# EAGLE board ACU rev2 TSB rev2 CCU rev7 TSAL rev5 (EAGLE 9.6.2), part 1 of 3
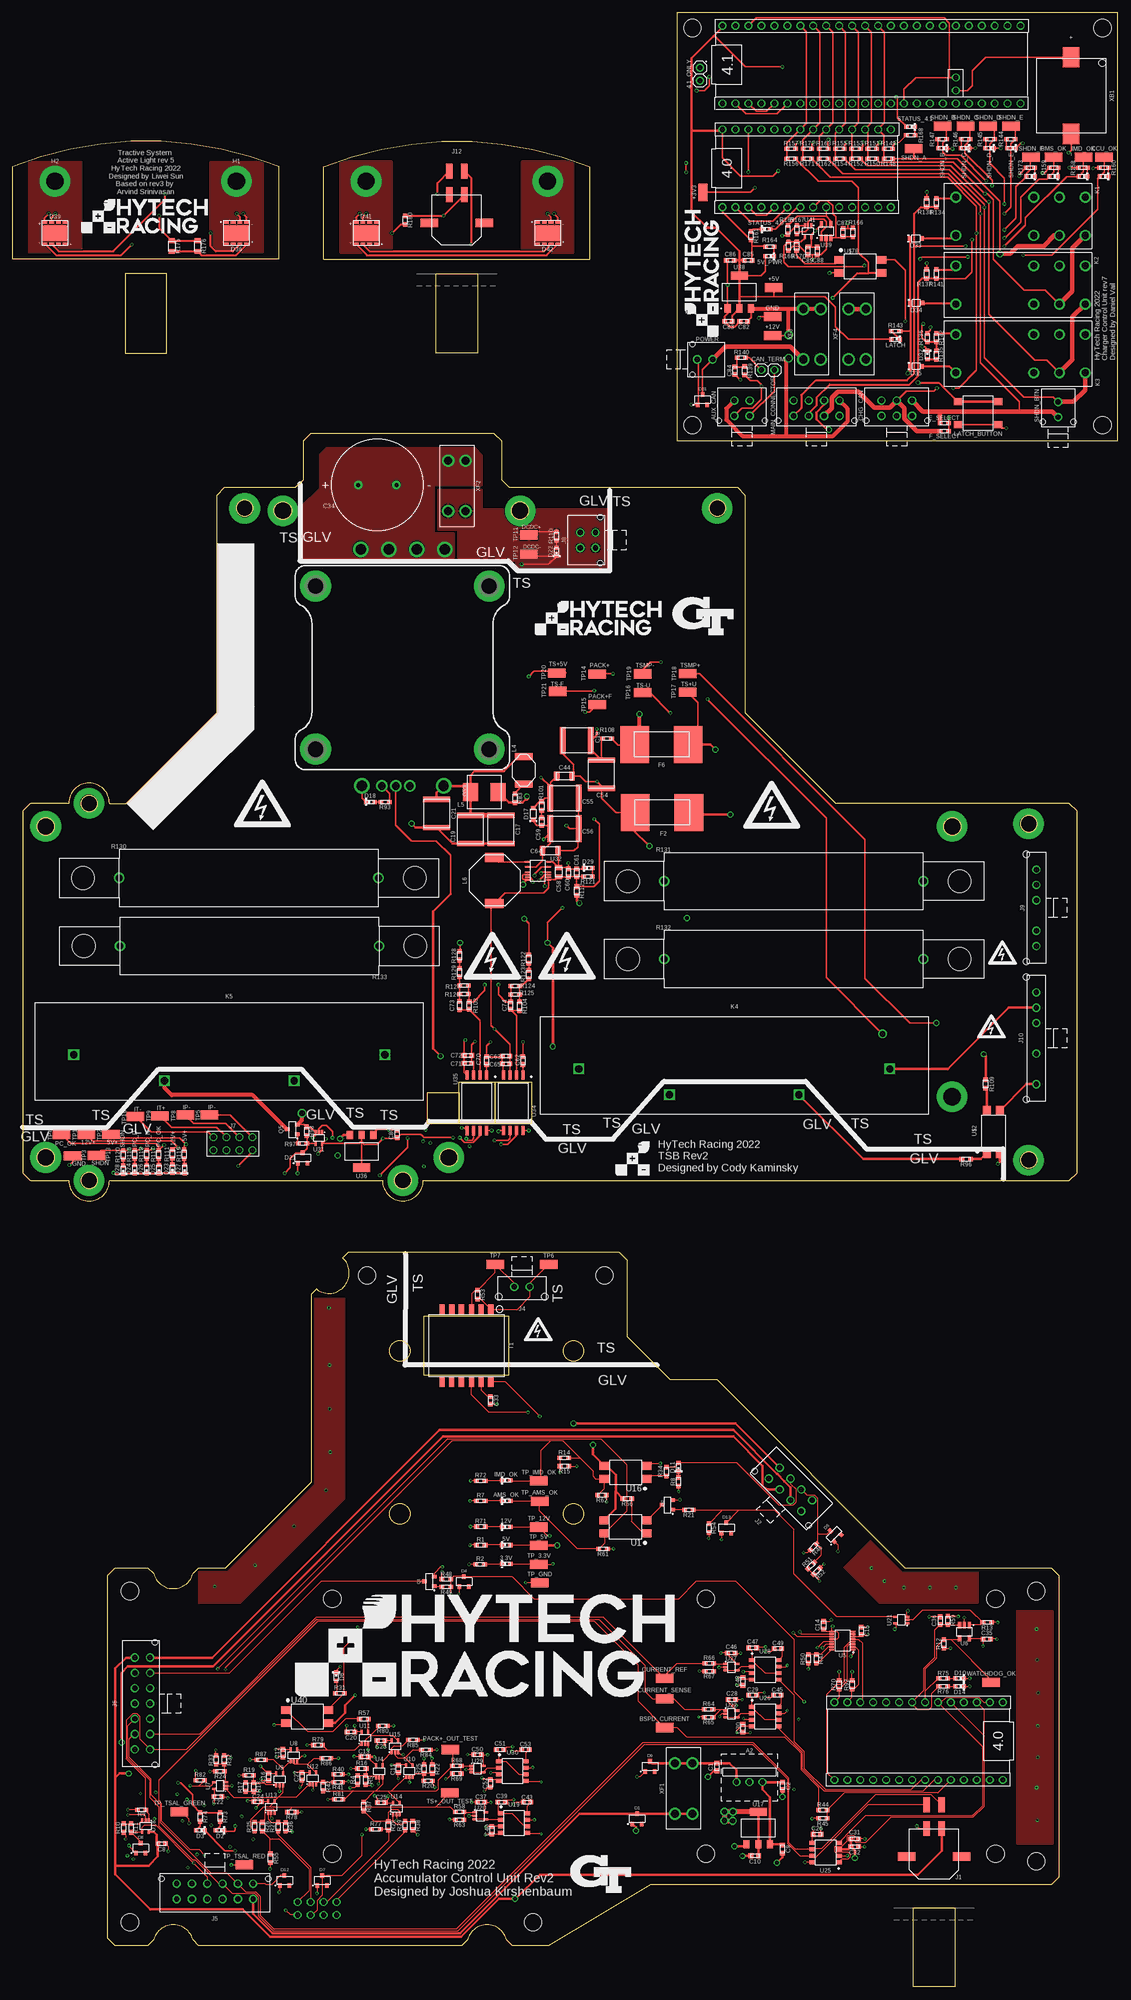
[diagram p0: board, top side]
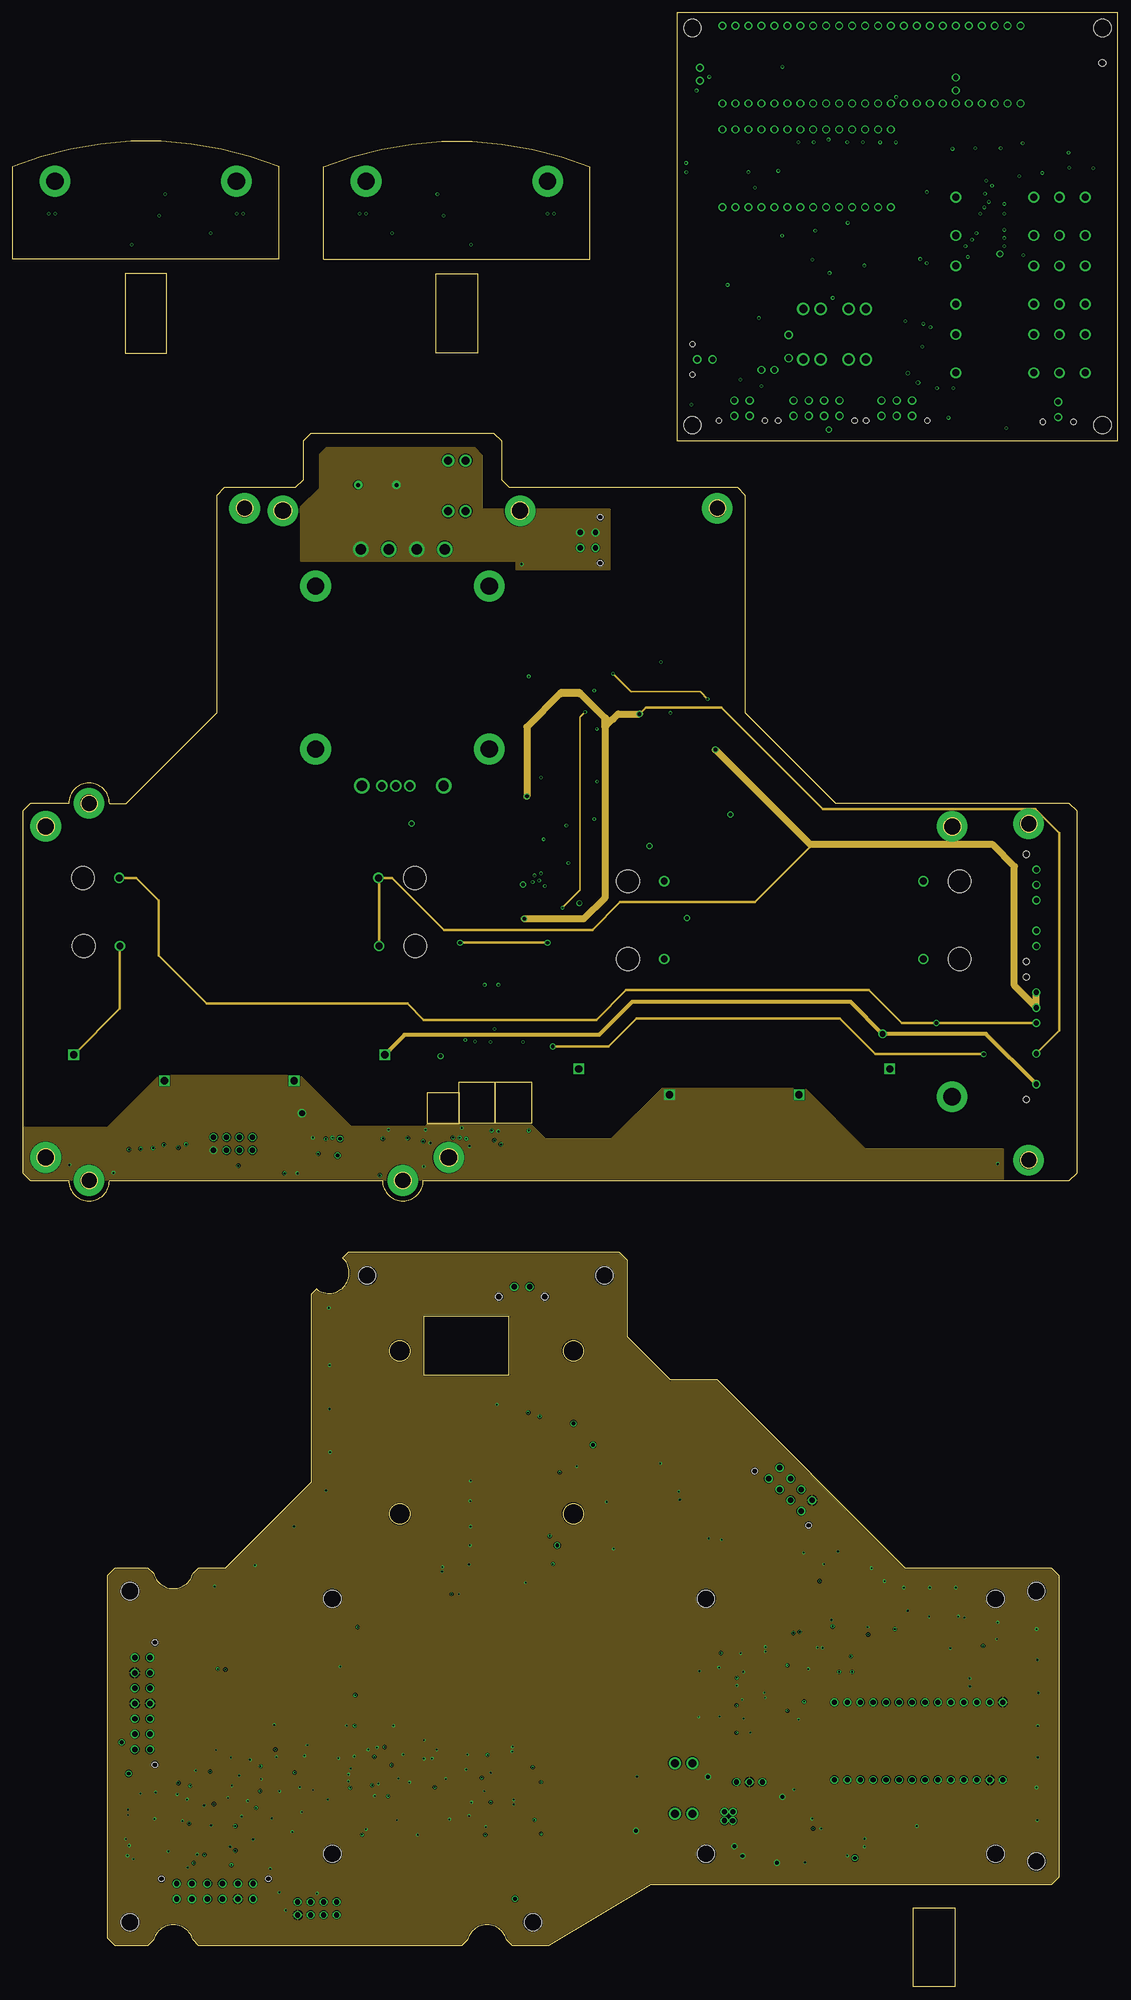
[diagram p1: board, inner layer Route2]
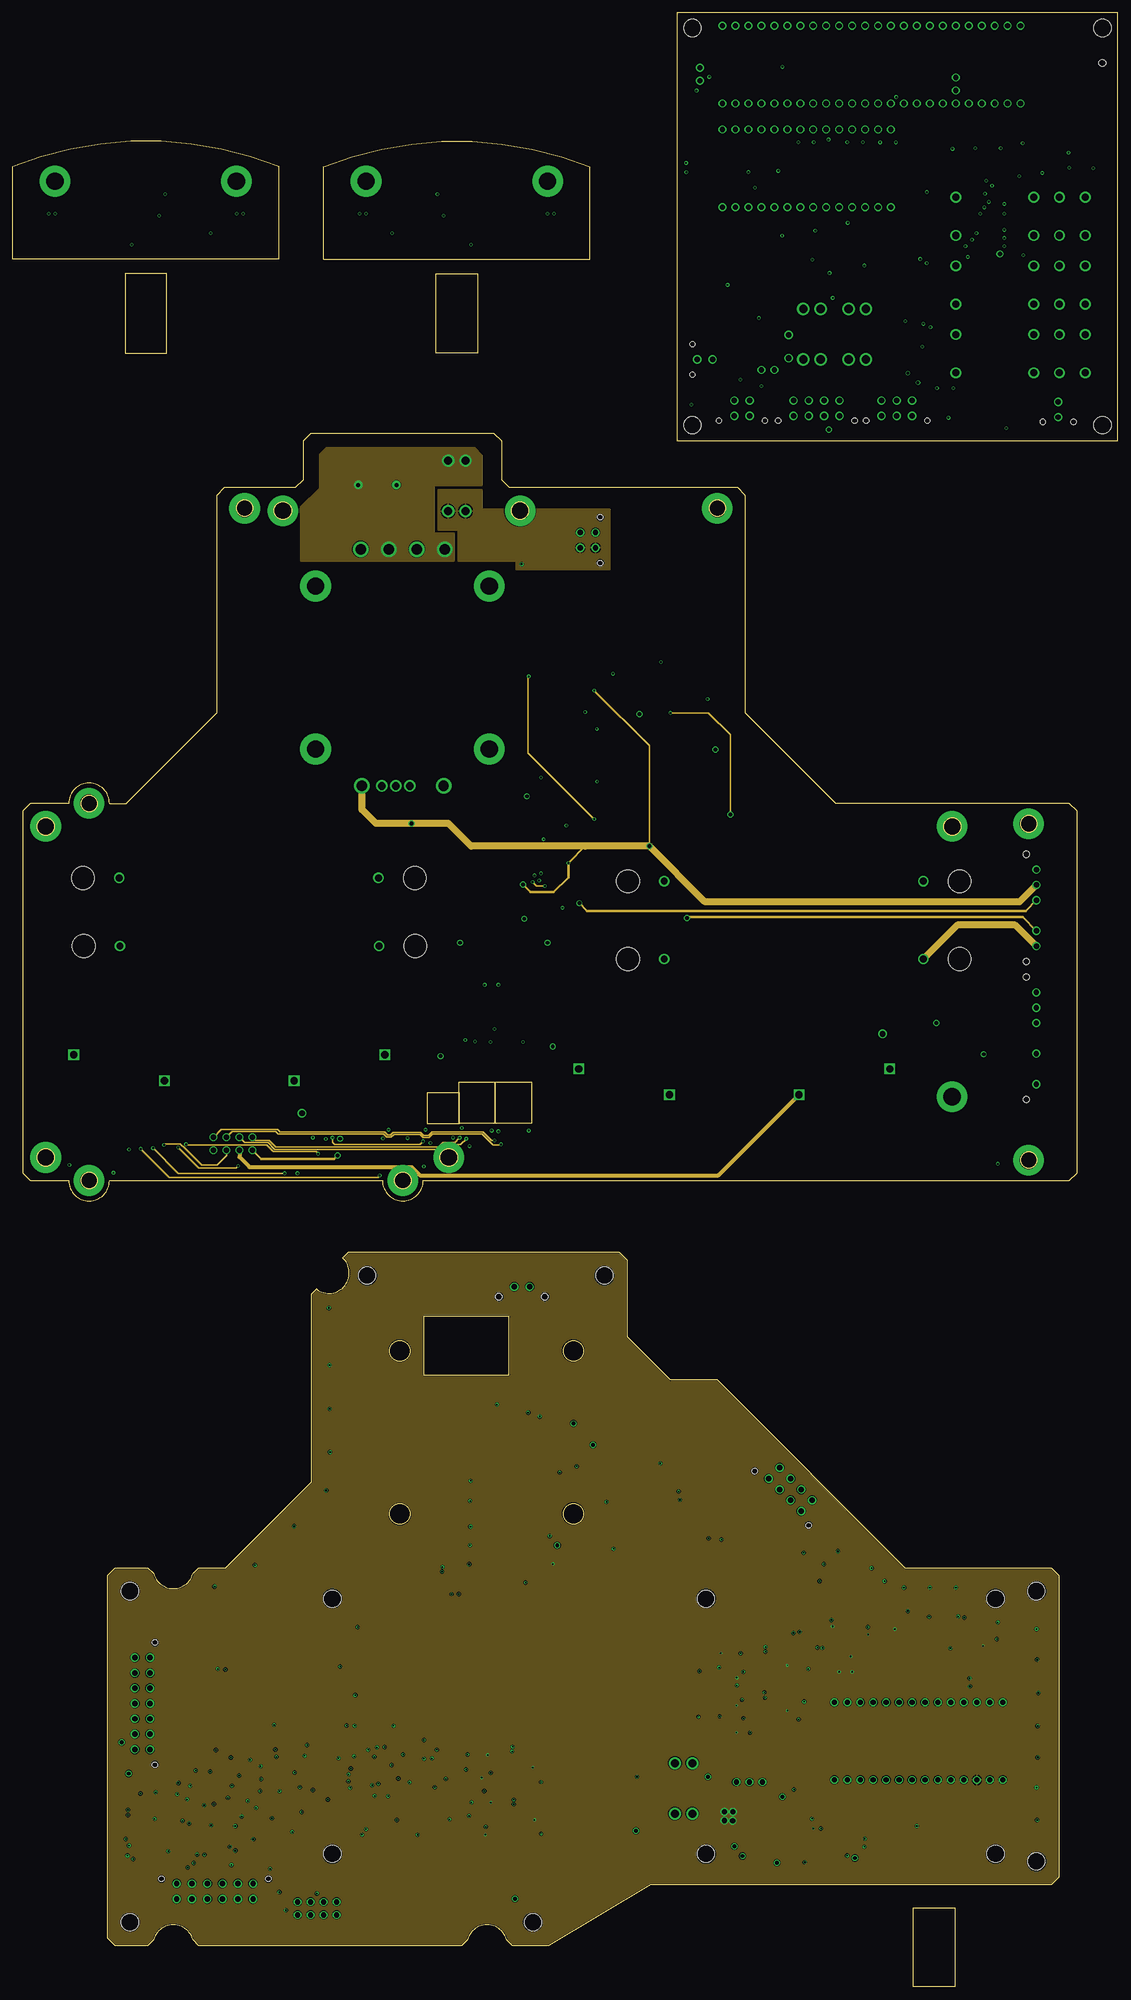
[diagram p2: board, inner layer Route15]
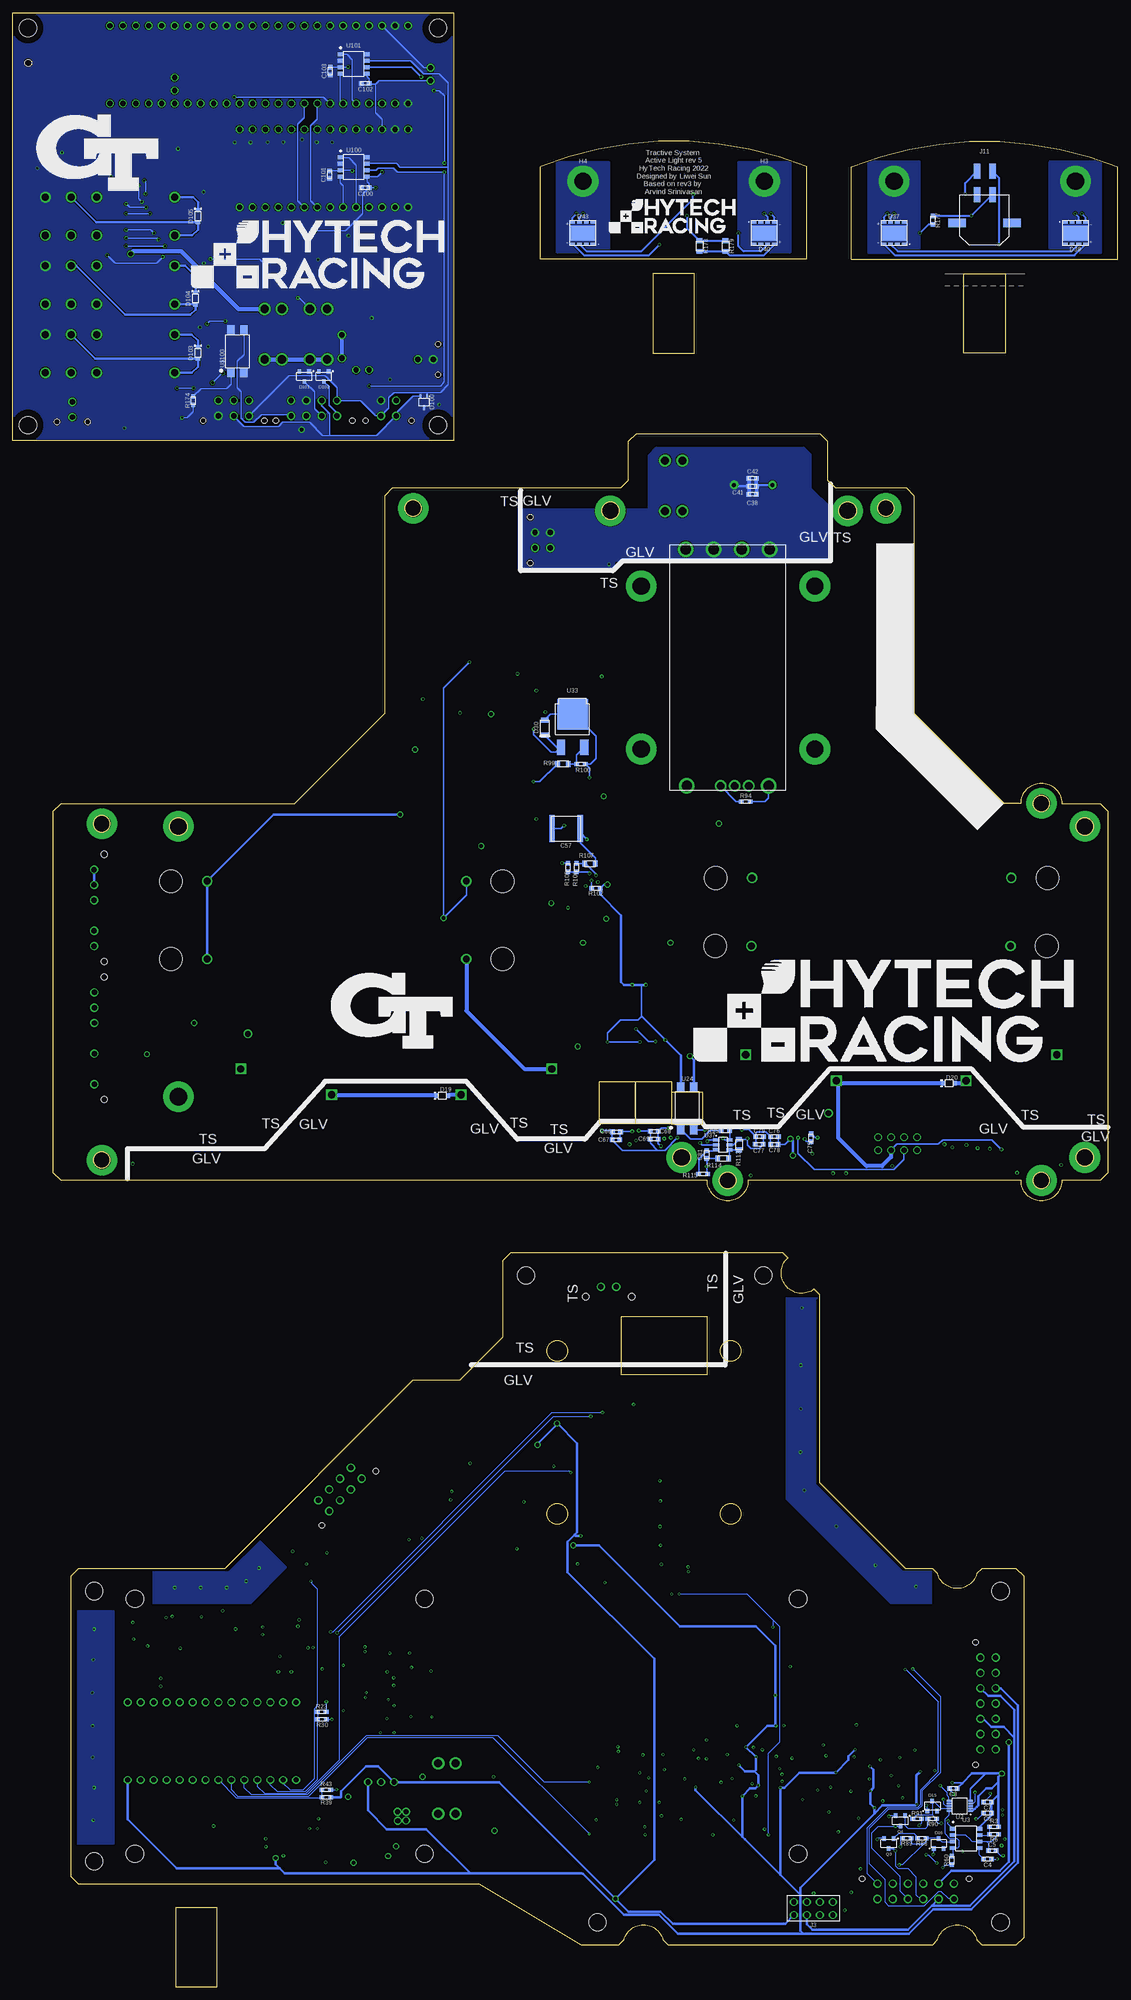
[diagram p3: board, bottom side, seen from below]

Size 216.59 x 378.69 mm. Coordinates in mm from the lower left corner, seen from the top.
Outline: 18.47,72.39 18.47,1.5 19.97,0 26.55,0 27.61,1.06 arc-149 35.32,1.06 36.38,0 88.05,0 89.11,1.06 arc-149 96.82,1.06 97.88,0 105.14,0 125.14,11.89 203.64,11.89 205.14,13.39 205.14,72.39 203.64,73.89 174.99,73.89 138.14,110.74 128.95,110.74 120.47,119.22 120.47,134.24 118.97,135.74 65.74,135.74 64.68,134.68 arc-175 59.53,128.57 58.47,127.5 58.47,90.74 41.62,73.89 36.38,73.89 35.32,72.83 arc-149 27.61,72.83 26.55,73.89 19.97,73.89 18.47,72.39
Outline: 1.96,222.25 1.96,151.36 3.46,149.86 10.96,149.86 arc180 18.96,149.86 72.46,149.86 arc180 80.46,149.86 207.13,149.86 208.63,151.36 208.63,222.25 207.13,223.75 161.31,223.75 143.63,241.43 143.63,284.09 142.13,285.59 97.38,285.59 95.88,287.09 95.88,294.71 94.38,296.21 58.38,296.21 56.88,294.71 56.88,287.09 55.38,285.59 41.46,285.59 39.96,284.09 39.96,241.43 22.28,223.75 18.96,223.75 arc180 10.96,223.75 3.46,223.75 1.96,222.25
Outline: 130.23,294.87 216.59,294.87 216.59,378.69 130.23,378.69 130.23,294.87
Outline: 52.17,330.43 52.17,348.49 arc44 0,348.49 0,330.43 52.17,330.43
Outline: 60.96,330.43 60.96,348.49 arc-44 113.13,348.49 113.13,330.43 60.96,330.43
Outline: circle at 109.88,116.49 radius 2
Outline: circle at 75.87,84.51 radius 2
Outline: circle at 109.88,84.53 radius 2
Outline: circle at 75.87,116.49 radius 2
Outline: circle at 6.46,219.25 radius 1.7
Outline: circle at 6.46,154.36 radius 1.7
Outline: circle at 85.46,154.36 radius 1.7
Outline: circle at 184.13,219.25 radius 1.7
Outline: circle at 52.96,281.09 radius 1.7
Outline: circle at 99.46,281.09 radius 1.7
Outline: circle at 138.13,281.59 radius 1.6
Outline: circle at 199.13,219.75 radius 1.6
Outline: circle at 199.13,153.86 radius 1.6
Outline: circle at 14.96,149.86 radius 1.6
Outline: circle at 14.96,223.75 radius 1.6
Outline: circle at 45.46,281.59 radius 1.6
Outline: circle at 76.46,149.86 radius 1.6
Copper layers (1+2*15+16): Top 0.035mm / dielectric 0.2mm / Route2 0.0175mm / dielectric 1.065mm / Route15 0.0175mm / dielectric 0.2mm / Bottom 0.035mm
Design rules "JLCPCB (4 Layer)": minimum track width 5mil, minimum drill 0.2mm, track to track 5mil, track to pad 5mil, pad to pad 5mil, via to via 20mil, smd to smd 5mil, copper to edge 0.2mm, drill to drill 21mil, minimum pad ring 6mil, minimum via ring 5mil, stop-mask expansion 2mil, vias tented up to drill 30mil, thermal gap 10mil

## Footprints (pad centres in the part's own frame; a part is rotated, then mirrored left to right if it is on the bottom)
0603-LED = smd 0.8 x 0.8: 1 -0.825,0; 2 0.825,0
1X02 = drill 1.016: 1 -1.27,0; 2 1.27,0
TEENSY_SHORT = drill 1.016: 3.3V 0,5.08; AGND/GND 0,2.54; D0 15.24,2.54; D1 15.24,5.08; D2 15.24,7.62; D3 15.24,10.16; D4 15.24,12.7; D5 15.24,15.24; D6 15.24,17.78; D7 15.24,20.32; D8 15.24,22.86; D9 15.24,25.4; D10 15.24,27.94; D11 15.24,30.48; D12 15.24,33.02; D13 0,33.02; D14 0,30.48; D15 0,27.94; D16 0,25.4; D17 0,22.86; D18 0,20.32; D19 0,17.78; D20 0,15.24; D21 0,12.7; D22 0,10.16; D23 0,7.62; GND 15.24,0; VIN 0,0
OKI-78SR = drill 0.991: 1 -2.54,0; 2 0,0; 3 2.54,0
TEENSY_LONG_EXT = drill 1.016: 3V3 0,5.08; 3V3@2 15.24,35.56; 3V3@3 10.16,45.72; AGND/GND 0,2.54; D0 15.24,2.54; D1 15.24,5.08; D2 15.24,7.62; D3 15.24,10.16; D4 15.24,12.7; D5 15.24,15.24; D6 15.24,17.78; D7 15.24,20.32; D8 15.24,22.86; D9 15.24,25.4; D10 15.24,27.94; D11 15.24,30.48; D12 15.24,33.02; D13 0,33.02; D14 0,30.48; D15 0,27.94; D16 0,25.4; D17 0,22.86; D18 0,20.32; D19 0,17.78; D20 0,15.24; D21 0,12.7; D22 0,10.16; D23 0,7.62; D24 15.24,38.1; D25 15.24,40.64; D26 15.24,43.18; D27 15.24,45.72; D28 15.24,48.26; D29 15.24,50.8; D30 15.24,53.34; D31 15.24,55.88; D32 15.24,58.42; D33 0,58.42; D34 0,55.88; D35 0,53.34; D36 0,50.8; D37 0,48.26; D38 0,45.72; D39 0,43.18; D40 0,40.64; D41 0,38.1; GND 15.24,0; GND@2 0,35.56; VBAT 12.7,45.72; VIN 0,0
MOLEX_MICROFIT_PTH_VERTICAL_04_DUAL = drill 1.067: 1 1.499,-2.997; 2 -1.499,-2.997; 3 1.499,0; 4 -1.499,0 | hole 1.067: 4.496,0.94; -4.496,0.94
MICRO_MINIATURE = smd 3.429 x 1.778: 1 0,0
0603-CAP = smd 0.9 x 0.9: 1 -0.75,0; 2 0.75,0
2220-CAP = smd 1.05 x 5.3: 1 -2.775,0; 2 2.775,0
EKYC*MM = drill 0.8 pad 1.651: + 3.75,0; - -3.75,0
1206-CAP = smd 1 x 1.8: 1 -1.5,0; 2 1.5,0
0805-CAP = smd 0.95 x 1.4: 1 -0.925,0; 2 0.925,0
MOLEX_MICROFIT_PTH_VERTICAL_06_DUAL = drill 1.067: 1 2.997,-2.997; 2 0,-2.997; 3 -2.997,-2.997; 4 2.997,0; 5 0,0; 6 -2.997,0 | hole 1.067: 5.994,0.94; -5.994,0.94
SOT-23 = smd 0.711 x 0.889: 1 -0.94,-1.003; 2 0.94,-1.003; 3 0,1.003
SOD-323 = smd 0.8 x 0.9: A -1.15,0; C 1.15,0
SOD123F = smd 1 x 1.5: A -1.45,0; C 1.45,0
IN-505FCHWV = smd 0.975 x 0.65: A+ -2.013,2.175; A- -2.013,-2.175; D+ 2.013,2.175; D- 2.013,-2.175 | smd 0.925 x 0.65: B+ -0.662,2.175; B- -0.662,-2.175; C+ 0.662,2.175; C- 0.662,-2.175 | smd 5 x 2.9: THERMAL 0,0
SC-70-3 = smd 0.95 x 0.4: 1 -1.1,0.65; 2 -1.1,-0.65; 3 1.1,0
0603-RES = smd 0.9 x 0.8: 1 -0.85,0; 2 0.85,0
0885 = smd 5.6 x 7.23: 1 -5.25,0; 2 5.25,0
MOUNTING_M3 = drill 3.4 pad 6: P$1 0,0
MOLEX_MICROFIT_SMD_RIGHTANGLE_04_DUAL = smd 1.27 x 2.921: 1 1.5,5.474; 2 -1.5,5.474; 3 1.5,10.097; 4 -1.5,10.097 | smd 3.429 x 1.651: PAD1 5.386,0; PAD2 -5.386,0
MOLEX_MICROFIT_PTH_VERTICAL_08_DUAL = drill 1.067: 1 4.496,-2.997; 2 1.499,-2.997; 3 -1.499,-2.997; 4 -4.496,-2.997; 5 4.496,0; 6 1.499,0; 7 -1.499,0; 8 -4.496,0 | hole 1.067: 7.493,0.94; -7.493,0.94
FLEX_STACK_PTH_08_DUAL = drill 1.016: 1 -3.81,1.27; 2 -1.27,1.27; 3 1.27,1.27; 4 3.81,1.27; 5 -3.81,-1.27; 6 -1.27,-1.27; 7 1.27,-1.27; 8 3.81,-1.27
MOLEX_MICROFIT_PTH_VERTICAL_02_SINGLE = drill 1.067: 1 1.499,0; 2 -1.499,0 | hole 1.321: 4.496,-1.956; -4.496,-1.956
MOLEX_MICROFIT_PTH_VERTICAL_12_DUAL = drill 1.067: 1 7.493,-2.997; 2 4.496,-2.997; 3 1.499,-2.997; 4 -1.499,-2.997; 5 -4.496,-2.997; 6 -7.493,-2.997; 7 7.493,0; 8 4.496,0; 9 1.499,0; 10 -1.499,0; 11 -4.496,0; 12 -7.493,0 | hole 1.067: 10.49,0.94; -10.49,0.94
MOLEX_MICROFIT_PTH_VERTICAL_14_DUAL = drill 1.067: 1 8.992,-2.997; 2 5.994,-2.997; 3 2.997,-2.997; 4 0,-2.997; 5 -2.997,-2.997; 6 -5.994,-2.997; 7 -8.992,-2.997; 8 8.992,0; 9 5.994,0; 10 2.997,0; 11 0,0; 12 -2.997,0; 13 -5.994,0; 14 -8.992,0 | hole 1.067: 11.989,0.94; -11.989,0.94
MOLEX_MICROFIT_PTH_VERTICAL_06_SINGLE_SPACED = drill 1.067: 1 -7.493,0; 2 -4.496,0; 3 -1.499,0; 4 4.496,0; 5 7.493,0 | hole 1.27: 10.503,-1.956; -10.503,-1.956
MOLEX_MICROFIT_PTH_VERTICAL_07_SINGLE_SPACED = drill 1.067: 1 -8.992,0; 2 -5.994,0; 3 -2.997,0; 4 2.997,0; 5 8.992,0 | hole 1.27: 12.002,-1.956; -12.002,-1.956
RT*2* = drill 1.4: 11 0,3.75; 12 -5.04,3.75; 14 5.04,3.75; 21 0,-3.75; 22 -5.04,-3.75; 24 5.04,-3.75; A1 -20.3,3.75; A2 -20.3,-3.75
335X = drill 1.397 square: 1 30.48,0; 2 12.7,-5.08; 3 -12.7,-5.08; 4 -30.48,0
74451133 = smd 1.4 x 3.5: 1 -2.7,0; 2 2.7,0
WE-LMHI = smd 2.95 x 3.5: 1 -2.725,0; 2 2.725,0
SRU1048 = smd 1.8 x 3.6: 1 -4.5,0; 2 4.5,0
B3S-100X = smd 1.55 x 1.3: 1 3.975,-2.25; 2 -3.975,-2.25; 3 3.975,2.25; 4 -3.975,2.25
MOLEX_MICROFIT_PTH_VERTICAL_02_DUAL = drill 1.067: 1 0,-2.997; 2 0,0 | hole 1.067: 2.997,0.94; -2.997,0.94
0805-RES = smd 0.9 x 1.2: 1 -1.05,0; 2 1.05,0
B20 = drill 1.35: 1 25.4,0; 2 -25.4,0 | hole 4.5: -32.51,0; 32.51,0
HM2112ZNLT_AIRGAP = smd 1.02 x 1.89: 1 -4.78,-7.145; 2 -2.89,-7.145; 3 -1,-7.145; 4 1,-7.145; 5 2.875,-7.145; 6 4.78,-7.145; 7 4.78,7.145; 8 2.89,7.145; 9 1,7.145; 10 -1,7.145; 11 -2.89,7.145; 12 -4.78,7.145
5015 = smd 3.429 x 1.778: 1 0,0
DIP-4 = smd 1.5 x 1.9: 1 -1.27,-4.15; 2 1.27,-4.15; 3 -1.27,4.15; 4 1.27,4.15
MSOP-10 = smd 0.305 x 0.889: 1 -1,-2.106; 2 -0.5,-2.106; 3 0,-2.106; 4 0.5,-2.106; 5 1,-2.106; 6 1,2.106; 7 0.5,2.106; 8 0,2.106; 9 -0.5,2.106; 10 -1,2.106
SOIC-08(NARROW,0.15") = smd 0.762 x 1.143: 1 -1.905,-2.603; 2 -0.635,-2.603; 3 0.635,-2.603; 4 1.905,-2.603; 5 1.905,2.603; 6 0.635,2.603; 7 -0.635,2.603; 8 -1.905,2.603
SC-70-5 = smd 0.4 x 0.9: 1 -0.65,-1.1; 2 0,-1.1; 3 0.65,-1.1; 4 0.65,1.1; 5 -0.65,1.1
MSOP-16 = smd 0.305 x 0.889: 1 -1.75,-2.106; 2 -1.25,-2.106; 3 -0.75,-2.106; 4 -0.25,-2.106; 5 0.25,-2.106; 6 0.75,-2.106; 7 1.25,-2.106; 8 1.75,-2.106; 9 1.75,2.106; 10 1.25,2.106; 11 0.75,2.106; 12 0.25,2.106; 13 -0.25,2.106; 14 -0.75,2.106; 15 -1.25,2.106; 16 -1.75,2.106
SOT-23-5 = smd 0.62 x 1.22: 1 -0.95,-1.31; 2 0,-1.31; 3 0.95,-1.31; 4 0.95,1.31; 5 -0.95,1.31
SOT223 = smd 1.2 x 1.6: 1 -2.3,-3.2; 2 0,-3.2; 3 2.3,-3.2 | smd 3.3 x 1.6: 4 0,3.2
DCM4623 = drill 2.03 pad 2.79: 1 -23.19,8; 5 -23.19,-8; 6 23.19,8.25; 7 23.19,2.75; 8 23.19,-2.75; 9 23.19,-8.25 | drill 1.52 pad 2.02: 2 -23.19,1.38; 3 -23.19,-1.38; 4 -23.19,-4.13
DIP-4_AIRGAP = smd 1.5 x 1.9: 1 -1.27,-4.15; 2 1.27,-4.15; 3 -1.27,4.15; 4 1.27,4.15
MSE16(12) = smd 0.309 x 0.902: 1 -1.75,-2.102; 3 -0.75,-2.102; 5 0.25,-2.102; 6 0.75,-2.102; 7 1.25,-2.102; 8 1.75,-2.102; 9 1.75,2.102; 10 1.25,2.102; 11 0.75,2.102; 12 0.25,2.102; 14 -0.75,2.102; 16 -1.75,2.102
DPAK(2-7K1S) = smd 1.6 x 3: 1 -2.3,-3.5; 3 2.3,-3.5 | smd 6 x 6: 2 0,3
SOIC-08(WIDE,0.295")-AIRGAP = smd 0.6 x 1.8: 1 -1.905,-5.45; 2 -0.635,-5.45; 3 0.635,-5.45; 4 1.905,-5.45; 5 1.905,5.45; 6 0.635,5.45; 7 -0.635,5.45; 8 -1.905,5.45
SOT-23-6 = smd 0.62 x 1.22: 1 -0.95,-1.31; 2 0,-1.31; 3 0.95,-1.31; 4 -0.95,1.31; 5 0,1.31; 6 0.95,1.31
SOT-223 = smd 1.2 x 1.6: 1 -2.3,-3.2; 2 0,-3.2; 3 2.3,-3.2 | smd 3.3 x 1.6: 4 0,3.2
MOUNTING_M3' = hole 3.4: 0,0
498 = smd 3.962 x 3.175: 1 -7.518,0; 2 7.518,0 | hole 1.346: -6.426,6.096
3568 = drill 1.6: 1 -4.953,1.702; 2 -4.953,-1.702; 3 4.953,-1.702; 4 4.953,1.702

## Placement (x,y rotation side)
3.3V  LED_0603_GREEN  [0603-LED]  96.7,74.69 0 top
4.1_ONLY  JUMPER__1X02  [1X02]  134.67,366.62 270 top
5V  LED_0603_BLUE  [0603-LED]  96.7,78.41 0 top
5V_PWR  LED_0603_BLUE  [0603-LED]  148.39,330.96 180 top
12V  LED_0603_RED  [0603-LED]  96.7,81.96 0 top
A1  TEENSY_4.0  [TEENSY_SHORT]  194.05,32.38 90 top
A2  VOLTAGE_REGULATOR_MODULE_OKI-78SR_5V  [OKI-78SR]  144.39,31.96 0 top
A3  TEENSY_4.0  [TEENSY_SHORT]  139.12,355.83 270 top
A4  TEENSY_4.1  [TEENSY_LONG_EXT]  139.12,376.15 270 top
AMS_OK  LED_0603_GREEN  [0603-LED]  96.7,87.08 0 top
AUX_CAN  CONNECTOR-CAN_MF_T_V_  [MOLEX_MICROFIT_PTH_VERTICAL_04_DUAL]  142.93,299.7 180 top
BMS_OK  LED_0603_GREEN  [0603-LED]  203.99,346.61 180 top
BSPD_CURRENT  TEST_POINT  [MICRO_MINIATURE]  127.74,42.64 0 top
C1  CAPACITOR_0603_25V_10UF  [0603-CAP]  138.02,34.93 270 top
C2  CAPACITOR_0603_25V_10UF  [0603-CAP]  150.87,31.2 270 top
C3  CAPACITOR_0603_25V_1UF  [0603-CAP]  32.25,30.72 180 bottom
C4  CAPACITOR_0603_10V_10NF  [0603-CAP]  25.52,16.88 0 bottom
C5  CAPACITOR_0603_10V_4.7UF  [0603-CAP]  24.61,18.52 0 bottom
C6  CAPACITOR_0603_25V_1UF  [0603-CAP]  25.52,25.89 180 bottom
C7  CAPACITOR_0603_25V_0.1UF  [0603-CAP]  25.52,28.05 180 bottom
C8  CAPACITOR_0603_25V_0.1UF  [0603-CAP]  29.19,19.91 0 top
C9  CAPACITOR_0603_10V_1UF  [0603-CAP]  150.85,18.85 270 top
C10  CAPACITOR_0603_10V_4.7UF  [0603-CAP]  145.44,17.53 180 top
C11  CAPACITOR_0603_10V_0.1UF  [0603-CAP]  75.57,34.56 270 top
C12  CAPACITOR_0603_10V_0.1UF  [0603-CAP]  52.97,37.63 270 top
C13  CAPACITOR_0603_10V_0.1UF  [0603-CAP]  68.94,36.92 180 top
C14  CAPACITOR_0603_10V_0.1UF  [0603-CAP]  158.93,62.71 90 top
C15  CAPACITOR_0603_10V_10NF  [0603-CAP]  166.31,61.59 270 top
C16  CAPACITOR_0603_10V_0.1UF  [0603-CAP]  50.15,32.99 270 top
C17  CAPACITOR_2220_630V_0.1UF  [2220-CAP]  95.68,218.67 270 top
C18  CAPACITOR_2220_630V_0.1UF  [2220-CAP]  110.54,236.07 180 top
C19  CAPACITOR_2220_630V_1UF  [2220-CAP]  89.71,218.67 270 top
C20  CAPACITOR_0603_10V_0.1UF  [0603-CAP]  66.27,41.8 180 top
C21  CAPACITOR_2220_630V_1UF  [2220-CAP]  83.1,221.79 270 top
C22  CAPACITOR_0603_10V_0.1UF  [0603-CAP]  40.21,29.1 0 top
C23  CAPACITOR_0603_10V_0.1UF  [0603-CAP]  72.17,40.07 180 top
C24  CAPACITOR_0603_10V_0.1UF  [0603-CAP]  47.99,28.11 180 top
C25  CAPACITOR_0603_10V_0.1UF  [0603-CAP]  72.22,27.93 180 top
C26  CAPACITOR_0603_10V_0.1UF  [0603-CAP]  157.65,21.73 180 top
C27  CAPACITOR_0603_10V_0.1UF  [0603-CAP]  56.7,33.11 270 top
C28  CAPACITOR_0603_25V_0.1UF  [0603-CAP]  140.96,48.12 0 top
C29  CAPACITOR_0603_10V_0.1UF  [0603-CAP]  145.03,49.01 0 top
C30  CAPACITOR_0603_10V_0.1UF  [0603-CAP]  143.12,42.53 270 top
C31  CAPACITOR_0603_10V_0.1UF  [0603-CAP]  165.02,20.84 180 top
C32  CAPACITOR_0603_10V_1UF  [0603-CAP]  165.02,19.31 180 top
C33  CAPACITOR_0603_10V_10NF  [0603-CAP]  93.63,106.77 270 top
C34  CAPACITOR_POLAR__3600UF  [EKYC*MM]  71.45,286.16 180 top
C35  CAPACITOR_0603_10V_0.1UF  [0603-CAP]  190.93,59.98 0 top
C36  CAPACITOR_0603_10V_0.1UF  [0603-CAP]  181.78,63.6 90 top
C37  CAPACITOR_0603_25V_0.1UF  [0603-CAP]  91.77,28.02 180 top
C38  CAPACITOR_0603_25V_10UF  [0603-CAP]  71.57,284.32 0 bottom
C39  CAPACITOR_0603_10V_0.1UF  [0603-CAP]  95.83,28.02 0 top
C40  CAPACITOR_0603_10V_0.1UF  [0603-CAP]  93.93,22.51 90 top
C41  CAPACITOR_0603_25V_1UF  [0603-CAP]  71.58,285.88 0 bottom
C42  CAPACITOR_0603_35V_0.1UF  [0603-CAP]  71.58,287.47 0 bottom
C43  CAPACITOR_0603_10V_680PF  [0603-CAP]  100.79,28.02 180 top
C44  CAPACITOR_1206_250V_0.1UF  [1206-CAP]  108.13,229.08 0 top
C45  CAPACITOR_0603_10V_680PF  [0603-CAP]  149.85,49.01 180 top
C46  CAPACITOR_0603_25V_0.1UF  [0603-CAP]  140.84,57.26 0 top
C47  CAPACITOR_0603_10V_0.1UF  [0603-CAP]  145.03,58.28 0 top
C48  CAPACITOR_0603_10V_0.1UF  [0603-CAP]  143.12,51.67 270 top
C49  CAPACITOR_0603_10V_680PF  [0603-CAP]  149.98,58.15 180 top
C50  CAPACITOR_0603_25V_0.1UF  [0603-CAP]  91.08,37.34 180 top
C51  CAPACITOR_0603_10V_0.1UF  [0603-CAP]  95.53,38.33 0 top
C52  CAPACITOR_0603_10V_0.1UF  [0603-CAP]  93.62,31.73 270 top
C53  CAPACITOR_0603_10V_680PF  [0603-CAP]  100.48,38.33 180 top
C54  CAPACITOR_2220_630V_1UF  [2220-CAP]  115.37,229.47 270 top
C55  CAPACITOR_2220_250V_1UF  [2220-CAP]  108.13,224.77 0 top
C56  CAPACITOR_2220_250V_1UF  [2220-CAP]  108.13,218.8 0 top
C57  CAPACITOR_2220_250V_1UF  [2220-CAP]  108.13,218.8 180 bottom
C58  CAPACITOR_0805_25V_22UF  [0805-CAP]  106.98,210.29 90 top
C59  CAPACITOR_0603_10V_10NF  [0603-CAP]  103.68,220.19 90 top
C60  CAPACITOR_0603_25V_1UF  [0603-CAP]  108.89,210.16 90 top
C61  CAPACITOR_0603_25V_0.1UF  [0603-CAP]  110.54,210.16 90 top
C62  CAPACITOR_0603_10V_1UF  [0603-CAP]  100,173.33 90 top
C63  CAPACITOR_0603_10V_1UF  [0603-CAP]  96.7,172.7 180 top
C64  CAPACITOR_1206_250V_0.1UF  [1206-CAP]  105.33,214.48 0 top
C65  CAPACITOR_0603_10V_1UF  [0603-CAP]  96.7,174.22 180 top
C66  CAPACITOR_0603_10V_1UF  [0603-CAP]  98.22,159.36 0 bottom
C67  CAPACITOR_0603_10V_0.1UF  [0603-CAP]  98.35,157.84 0 bottom
C68  CAPACITOR_0603_10V_0.1UF  [0603-CAP]  90.86,159.49 0 bottom
C69  CAPACITOR_0603_10V_1UF  [0603-CAP]  90.86,157.96 0 bottom
C70  CAPACITOR_0603_10V_1UF  [0603-CAP]  92.89,173.33 90 top
C71  CAPACITOR_0603_10V_1UF  [0603-CAP]  89.2,172.82 180 top
C72  CAPACITOR_0603_10V_1UF  [0603-CAP]  89.2,174.35 180 top
C73  CAPACITOR_0603_10V_10NF  [0603-CAP]  89.46,184.13 90 top
C74  CAPACITOR_0603_10V_10NF  [0603-CAP]  97.59,184.13 90 top
C75  CAPACITOR_0603_10V_0.1UF  [0603-CAP]  60.12,158.22 90 bottom
C76  CAPACITOR_0603_25V_1UF  [0603-CAP]  67.27,158.44 180 bottom
C77  CAPACITOR_0603_10V_4.7UF  [0603-CAP]  70.28,156.95 180 bottom
C78  CAPACITOR_0603_25V_0.1UF  [0603-CAP]  67.29,156.92 180 bottom
C79  CAPACITOR_0603_10V_0.1UF  [0603-CAP]  70.21,158.46 180 bottom
C80  CAPACITOR_0603_10V_0.1UF  [0603-CAP]  75.36,158.98 90 top
C81  CAPACITOR_0603_10V_0.1UF  [0603-CAP]  80.57,154.92 270 bottom
C82  CAPACITOR_0603_25V_10UF  [0603-CAP]  143.28,318.24 180 top
C83  CAPACITOR_0603_25V_10UF  [0603-CAP]  140.26,318.24 180 top
C84  CAPACITOR_0603_10V_4.7NF  [0603-CAP]  141.55,308.54 270 top
C85  CAPACITOR_0603_10V_1UF  [0603-CAP]  144.15,330.18 0 top
C86  CAPACITOR_0603_10V_0.1UF  [0603-CAP]  140.64,330.18 0 top
C87  CAPACITOR_0603_10V_0.1UF  [0603-CAP]  162.74,335.64 270 top
C88  CAPACITOR_0603_10V_0.1UF  [0603-CAP]  157.68,332 90 top
C89  CAPACITOR_0603_10V_0.1UF  [0603-CAP]  155.85,332.03 90 top
C100  CAPACITOR_0603_10V_0.1UF  [0603-CAP]  147.5,344.4 0 bottom
C101  CAPACITOR_0603_10V_0.1UF  [0603-CAP]  154.48,346.94 90 bottom
C102  CAPACITOR_0603_10V_0.1UF  [0603-CAP]  147.5,364.85 0 bottom
C103  CAPACITOR_0603_10V_0.1UF  [0603-CAP]  154.36,367.26 90 bottom
CAN_TERM  JUMPER__1X02  [1X02]  148.01,308.69 0 top
CCU_OK  LED_0603_GREEN  [0603-LED]  213.92,346.61 180 top
CHG_CAN  CONNECTOR-6_MF_T_V_  [MOLEX_MICROFIT_PTH_VERTICAL_06_DUAL]  173.28,299.7 180 top
CURRENT_REF  TEST_POINT  [MICRO_MINIATURE]  127.74,52.3 0 top
CURRENT_SENSE  TEST_POINT  [MICRO_MINIATURE]  127.74,48.27 0 top
D1  TVS_15V  [SOT-23]  122.37,24.78 0 top
D2  LED_0603_GREEN  [0603-LED]  40.64,22.51 180 top
D3  LED_0603_RED  [0603-LED]  36.75,22.51 180 top
D4  TVS_8V  [SOT-23]  88.44,71.23 0 top
D5  TVS_15V  [SOT-23]  160.96,80.49 45 top
D6  LED_0603_RED  [0603-LED]  63.36,52.65 270 top
D7  TVS_15V  [SOT-23]  60.63,12.68 0 top
D8  TVS_15V  [SOT-23]  25.07,19.03 0 top
D9  TVS_15V  [SOT-23]  124.89,35.03 0 top
D10  LED_0603_GREEN  [0603-LED]  185.57,52.3 180 top
D11  LED_0603_YELLOW  [0603-LED]  130.51,93.66 90 top
D12  TVS_15V  [SOT-23]  53.26,12.68 0 top
D13  TVS_8V  [SOT-23]  139.85,81.78 0 top
D14  LED_0603_RED  [0603-LED]  185.57,50.73 180 top
D15  TVS_15V  [SOT-23]  36.37,27.28 0 bottom
D16  TVS_15V  [SOT-23]  35.1,19.91 0 bottom
D17  SCHOTTKY_SOD323_30V  [SOD-323]  102.03,221.72 270 top
D18  LED_0603_RED  [0603-LED]  70.06,224.04 0 top
D19  SCHOTTKY_SOD323_30V  [SOD-323]  132.38,166.47 180 bottom
D20  SCHOTTKY_SOD323_30V  [SOD-323]  33.07,168.89 180 bottom
D21  TVS_8V  [SOT-23]  56.82,154.28 0 top
D22  LED_0603_BLUE  [0603-LED]  106.6,273.08 90 top
D23  LED_0603_BLUE  [0603-LED]  31.29,152.12 90 top
D24  LED_0603_WHITE  [0603-LED]  23.91,152.05 90 top
D25  LED_0603_GREEN  [0603-LED]  28.65,152.05 90 top
D26  LED_0603_YELLOW  [0603-LED]  26.28,152.05 90 top
D27  LED_0603_BLUE  [0603-LED]  33.67,152.05 90 top
D28  LED_0603_ORANGE  [0603-LED]  21.67,151.93 90 top
D29  LED_0603_BLUE  [0603-LED]  112.76,211.12 0 top
D30  RECTIFIER_400V_SOD123  [SOD123F]  112.32,238.61 270 bottom
D31  TVS_15V  [SOT-23]  135.2,302.87 0 top
D32  LED_0603_RED  [0603-LED]  179.27,311.63 270 top
D33  SCHOTTKY_SOD323_30V  [SOD-323]  177.01,334.47 180 top
D34  SCHOTTKY_SOD323_30V  [SOD-323]  177.09,321.79 180 top
D35  SCHOTTKY_SOD323_30V  [SOD-323]  177.06,309.42 180 top
D36  LED_RGBW_IN-505FCHWV  [IN-505FCHWV]  43.87,335.51 180 top
D37  LED_RGBW_IN-505FCHWV  [IN-505FCHWV]  43.87,335.51 0 bottom
D38  LED_RGBW_IN-505FCHWV  [IN-505FCHWV]  8.31,335.51 180 bottom
D39  LED_RGBW_IN-505FCHWV  [IN-505FCHWV]  8.31,335.51 0 top
D40  LED_RGBW_IN-505FCHWV  [IN-505FCHWV]  69.27,335.51 180 bottom
D41  LED_RGBW_IN-505FCHWV  [IN-505FCHWV]  69.27,335.51 0 top
D42  LED_RGBW_IN-505FCHWV  [IN-505FCHWV]  104.83,335.51 180 top
D43  LED_RGBW_IN-505FCHWV  [IN-505FCHWV]  104.83,335.51 0 bottom
D100  TVS_BIDIRECTIONAL_DUAL  [SC-70-3]  135.99,302.41 270 bottom
D101  TVS_15V  [SOT-23]  159.44,307.44 180 bottom
D102  TVS_15V  [SOT-23]  155.63,307.44 180 bottom
D103  SCHOTTKY_SOD323_30V  [SOD-323]  180.26,312.01 90 bottom
D104  SCHOTTKY_SOD323_30V  [SOD-323]  180.77,322.68 90 bottom
D105  SCHOTTKY_SOD323_30V  [SOD-323]  180.26,338.81 90 bottom
E_SELECT  JUMPER_0603_  [0603-RES]  182.58,298.25 0 top
F2  FUSE_0885_1.25  [0885]  127.28,221.98 180 top
F6  FUSE_0885_1.25  [0885]  127.18,235.31 180 top
F_SELECT  JUMPER_0603_  [0603-RES]  182.58,296.7 0 top
H1  MOUNTING_HEATSINK_M3  [MOUNTING_M3]  43.87,345.67 0 top
H2  MOUNTING_HEATSINK_M3  [MOUNTING_M3]  8.31,345.67 0 top
H3  MOUNTING_HEATSINK_M3  [MOUNTING_M3]  69.27,345.67 0 bottom
H4  MOUNTING_HEATSINK_M3  [MOUNTING_M3]  104.83,345.67 0 bottom
IMD_OK  LED_0603_ORANGE  [0603-LED]  96.7,91.06 0 top
J1  CONNECTOR-CAN_μF_S_RA_  [MOLEX_MICROFIT_SMD_RIGHTANGLE_04_DUAL]  180.59,17.38 0 top
J2  CONNECTOR-8_MF_T_V_  [MOLEX_MICROFIT_PTH_VERTICAL_08_DUAL]  151.38,88.25 135 top
J3  CONNECTOR-8_S_S  [FLEX_STACK_PTH_08_DUAL]  59.67,7.2 0 bottom
J4  CONNECTOR-2_MF_T_V_  [MOLEX_MICROFIT_PTH_VERTICAL_02_SINGLE]  99.8,129.02 0 top
J5  CONNECTOR-12_MF_T_V_  [MOLEX_MICROFIT_PTH_VERTICAL_12_DUAL]  39.62,12.05 0 top
J6  CONNECTOR-14_MF_T_V_  [MOLEX_MICROFIT_PTH_VERTICAL_14_DUAL]  26.92,47.36 270 top
J7  CONNECTOR-8_S_S  [FLEX_STACK_PTH_08_DUAL]  43.16,157.06 180 top
J8  CONNECTOR-4__  [MOLEX_MICROFIT_PTH_VERTICAL_04_DUAL]  114.22,275.34 270 top
J9  CONNECTOR-5_MICRO_V6S_  [MOLEX_MICROFIT_PTH_VERTICAL_06_SINGLE_SPACED]  200.63,203.28 270 top
J10  CONNECTOR-5_MICRO_V7S_  [MOLEX_MICROFIT_PTH_VERTICAL_07_SINGLE_SPACED]  200.61,177.72 270 top
J11  CONNECTOR-4_μF_S_RA_  [MOLEX_MICROFIT_SMD_RIGHTANGLE_04_DUAL]  26.09,337.54 0 bottom
J12  CONNECTOR-4_μF_S_RA_  [MOLEX_MICROFIT_SMD_RIGHTANGLE_04_DUAL]  87.05,337.54 0 top
K1  RELAY_DPDT  [RT*2*]  205.16,338.81 0 top
K2  RELAY_DPDT  [RT*2*]  205.16,325.35 0 top
K3  RELAY_DPDT  [RT*2*]  205.16,311.89 0 top
K4  RELAY_SPST_NC_POLARIZED_3550_12  [335X]  141.41,171.74 0 top
K5  RELAY_SPST_NO_3550_12  [335X]  42.44,174.5 0 top
L4  INDUCTOR_74451133_3.6UH  [74451133]  100.15,230.21 270 top
L5  INDUCTOR_WELMHI_56UH  [WE-LMHI]  92.42,225.99 0 top
L6  INDUCTOR_SRU1048_330UH  [SRU1048]  94.41,208.64 270 top
LATCH  LED_0603_WHITE  [0603-LED]  173.02,314.68 180 top
LATCH_BUTTON  BUTTON  [B3S-100X]  189.18,300.23 180 top
MAIN_CONNECTOR  CONNECTOR-8_MF_T_V_  [MOLEX_MICROFIT_PTH_VERTICAL_08_DUAL]  157.53,299.7 180 top
OKHS  LED_0603_YELLOW  [0603-LED]  209.75,346.61 180 top
PACK+_OUT_TEST  TEST_POINT  [MICRO_MINIATURE]  85.78,38.33 180 top
POWER  CONNECTOR-2_μF_T_V_  [MOLEX_MICROFIT_PTH_VERTICAL_02_DUAL]  134.16,310.75 90 top
Q1  TRANSISTOR_N_MOS__PMV15ENEA  [SOT-23]  81.66,71.31 90 top
Q2  TRANSISTOR_N_MOS__PMV15ENEA  [SOT-23]  128.33,86.31 90 top
Q3  TRANSISTOR_N_MOS__PMV15ENEA  [SOT-23]  44.88,19.91 180 bottom
Q4  TRANSISTOR_N_MOS__PMV15ENEA  [SOT-23]  42.6,24.36 180 bottom
Q5  TRANSISTOR_N_MOS__PMV15ENEA  [SOT-23]  54.79,159.87 90 top
R1  RESISTOR_0603_1K  [0603-RES]  91.72,78.41 0 top
R2  RESISTOR_0603_1K  [0603-RES]  91.62,74.65 0 top
R3  RESISTOR_0603_1K  [0603-RES]  24.25,23.23 0 bottom
R4  RESISTOR_0603_DNP  [0603-RES]  67.62,32.38 270 top
R5  RESISTOR_0603_4.12K  [0603-RES]  69.14,32.38 270 top
R6  RESISTOR_0603_43K  [0603-RES]  24.25,21.7 180 bottom
R7  RESISTOR_0603_1K  [0603-RES]  91.72,87.07 0 top
R8  RESISTOR_0603_1K  [0603-RES]  130.5,90.83 90 top
R9  RESISTOR_0603_10K  [0603-RES]  25.27,26.53 0 top
R10  RESISTOR_0603_1K  [0603-RES]  21.71,22.97 90 top
R11  RESISTOR_0603_1.4K  [0603-RES]  23.24,22.97 270 top
R12  RESISTOR_0603_10K  [0603-RES]  182.52,59.08 90 top
R13  RESISTOR_0603_100K  [0603-RES]  190.99,63.24 180 top
R14  RESISTOR_0603_33K  [0603-RES]  108.09,95.51 180 top
R15  RESISTOR_0603_12K  [0603-RES]  108.12,93.88 0 top
R16  RESISTOR_0603_10.2K  [0603-RES]  68.41,34.61 0 top
R17  RESISTOR_0603_4.12K  [0603-RES]  45.62,31.01 270 top
R18  RESISTOR_0603_DNP  [0603-RES]  47.17,31.01 270 top
R19  RESISTOR_0603_10.2K  [0603-RES]  46.34,33.27 0 top
R20  RESISTOR_0603_11.5K  [0603-RES]  81.39,32.22 0 top
R21  RESISTOR_0603_10  [0603-RES]  132.52,85.3 180 top
R22  RESISTOR_0603_DNP  [0603-RES]  82.23,34.54 270 top
R23  RESISTOR_0603_18.7K  [0603-RES]  156.02,45.76 180 bottom
R24  RESISTOR_0603_84.5K  [0603-RES]  40.62,34.05 180 top
R25  RESISTOR_0603_11.5K  [0603-RES]  80.65,34.54 270 top
R26  RESISTOR_0603_11.5K  [0603-RES]  48.93,23.23 90 top
R27  RESISTOR_0603_11.5K  [0603-RES]  51.97,23.23 90 top
R28  RESISTOR_0603_11.5K  [0603-RES]  73.62,23.39 90 top
R29  RESISTOR_0603_11.5K  [0603-RES]  76.89,23.46 90 top
R30  RESISTOR_0603_33K  [0603-RES]  156,44.24 0 bottom
R31  RESISTOR_0603_1K  [0603-RES]  64.12,49.39 0 top
R32  RESISTOR_0603_DNP  [0603-RES]  41.43,36.31 270 top
R33  RESISTOR_0603_11.5K  [0603-RES]  39.86,36.31 270 top
R34  RESISTOR_0603_2K  [0603-RES]  128.11,92.8 270 top
R35  RESISTOR_0603_10.5K  [0603-RES]  47.38,23.26 270 top
R36  RESISTOR_0603_10.5K  [0603-RES]  53.5,23.21 270 top
R37  RESISTOR_0603_10.5K  [0603-RES]  68.76,27.2 90 top
R38  RESISTOR_0603_10.5K  [0603-RES]  78.42,23.46 270 top
R39  RESISTOR_0603_33K  [0603-RES]  155.11,28.97 180 bottom
R40  RESISTOR_0603_DNP  [0603-RES]  63.76,33.47 180 top
R41  RESISTOR_0603_215K  [0603-RES]  63.76,31.92 180 top
R42  RESISTOR_0603_11.3K  [0603-RES]  60.86,31.11 270 top
R43  RESISTOR_0603_12K  [0603-RES]  155.14,30.49 0 bottom
R44  RESISTOR_0603_33K  [0603-RES]  158.77,26.48 0 top
R45  RESISTOR_0603_12K  [0603-RES]  158.77,24.83 180 top
R46  RESISTOR_0603_2.2K  [0603-RES]  156.95,78.07 45 top
R47  RESISTOR_0603_1K  [0603-RES]  157.48,56.12 90 top
R48  RESISTOR_0603_10K  [0603-RES]  84.98,71.74 180 top
R49  RESISTOR_0603_10  [0603-RES]  84.98,70.19 180 top
R50  RESISTOR_0603_1K  [0603-RES]  155.93,56.11 270 top
R51  RESISTOR_0603_33K  [0603-RES]  156.46,74.39 225 top
R52  RESISTOR_0603_15K  [0603-RES]  157.59,73.29 45 top
R53  RESISTOR_0603_100  [0603-RES]  91.11,127.48 270 top
R54  RESISTOR_0603_10K  [0603-RES]  136.42,81.73 270 top
R55  RESISTOR_0603_10K  [0603-RES]  50.5,17.07 90 top
R56  RESISTOR_0603_2K  [0603-RES]  120.46,87.51 180 top
R57  RESISTOR_0603_470  [0603-RES]  68.84,44.31 180 top
R58  RESISTOR_0603_10K  [0603-RES]  87.58,26.11 0 top
R59  RESISTOR_0603_10K  [0603-RES]  183.3,63.66 270 top
R60  RESISTOR_0603_10K  [0603-RES]  32.51,16.62 90 bottom
R61  RESISTOR_0603_10K  [0603-RES]  115.72,77.66 180 top
R62  RESISTOR_0603_10K  [0603-RES]  115.48,88.2 180 top
R63  RESISTOR_0603_12K  [0603-RES]  87.58,24.59 180 top
R64  RESISTOR_0603_10K  [0603-RES]  136.39,46.21 0 top
R65  RESISTOR_0603_12K  [0603-RES]  136.39,44.69 180 top
R66  RESISTOR_0603_10K  [0603-RES]  136.52,55.23 0 top
R67  RESISTOR_0603_12K  [0603-RES]  136.52,53.71 180 top
R68  RESISTOR_0603_10K  [0603-RES]  87.02,35.16 0 top
R69  RESISTOR_0603_12K  [0603-RES]  87.02,33.63 180 top
R70  RESISTOR_0603_2K  [0603-RES]  161.98,51.03 90 top
R71  RESISTOR_0603_1K  [0603-RES]  91.75,82.02 0 top
R72  RESISTOR_0603_2K  [0603-RES]  91.72,91.01 0 top
R73  RESISTOR_0603_2K  [0603-RES]  40.64,25.12 270 top
R74  RESISTOR_0603_2K  [0603-RES]  36.75,25.12 270 top
R75  RESISTOR_0603_470  [0603-RES]  182.37,52.3 180 top
R76  RESISTOR_0603_470  [0603-RES]  182.37,50.73 180 top
R77  RESISTOR_0603_10K  [0603-RES]  71.17,22.68 0 top
R78  RESISTOR_0603_10K  [0603-RES]  54.69,26.09 180 top
R79  RESISTOR_0603_10K  [0603-RES]  59.82,39.22 0 top
R80  RESISTOR_0603_10K  [0603-RES]  72.52,43 180 top
R81  RESISTOR_0603_10K  [0603-RES]  63.88,28.55 0 top
R82  RESISTOR_0603_10K  [0603-RES]  36.73,32.34 0 top
R83  RESISTOR_0603_1.62  [0603-RES]  98.42,224.76 270 top
R84  RESISTOR_0603_10K  [0603-RES]  80.98,38.3 180 top
R85  RESISTOR_0603_10K  [0603-RES]  78.44,40.21 180 top
R86  RESISTOR_0603_10K  [0603-RES]  61.47,36.65 180 top
R87  RESISTOR_0603_10K  [0603-RES]  48.67,36.35 0 top
R88  RESISTOR_0603_10  [0603-RES]  38.41,20.93 180 bottom
R89  RESISTOR_0603_10K  [0603-RES]  41.35,20.93 180 bottom
R90  RESISTOR_0603_10  [0603-RES]  36.37,24.74 180 bottom
R91  RESISTOR_0603_10K  [0603-RES]  39.32,24.74 0 bottom
R92  RESISTOR_0603_2K  [0603-RES]  164.52,51.03 90 top
R93  RESISTOR_0603_1K  [0603-RES]  72.97,224.03 180 top
R94  RESISTOR_0603_DNP  [0603-RES]  72.93,224.14 0 bottom
R95  RESISTOR_0603_1K  [0603-RES]  76.89,159.62 180 bottom
R96  RESISTOR_0603_1K  [0603-RES]  186.87,154.03 180 top
R97  RESISTOR_0603_10  [0603-RES]  56.82,157.08 180 top
R98  RESISTOR_0603_10K  [0603-RES]  57.58,159.49 270 top
R99  RESISTOR_0805_HV365K  [0805-RES]  108.76,231.5 0 bottom
R100  RESISTOR_0603_3.32K  [0603-RES]  105.21,231.5 0 bottom
R101  RESISTOR_0603_10K  [0603-RES]  103.68,223.24 270 top
R102  RESISTOR_0603_75K  [0603-RES]  102.29,207.11 180 bottom
R103  RESISTOR_0603_33.2K  [0603-RES]  87.55,184.13 270 top
R104  RESISTOR_0603_33.2K  [0603-RES]  99.36,184 270 top
R105  RESISTOR_0603_8.66K  [0603-RES]  107.75,211.18 270 bottom
R106  RESISTOR_0603_13K  [0603-RES]  106.1,211.18 90 bottom
R107  RESISTOR_0805_976K  [0805-RES]  103.43,211.94 0 bottom
R108  RESISTOR_0603_3.3  [0603-RES]  116.51,236.45 180 top
R109  RESISTOR_0603_3.3  [0603-RES]  190.68,168.76 270 top
R110  RESISTOR_0603_1K  [0603-RES]  106.6,276.12 90 top
R111  RESISTOR_0603_1K  [0603-RES]  31.29,155.04 90 top
R112  RESISTOR_0603_1K  [0603-RES]  110.54,206.61 270 top
R113  RESISTOR_0805_1M  [0805-RES]  74.22,156.88 90 bottom
R114  RESISTOR_0805_523K  [0805-RES]  77.33,154.17 0 bottom
R115  RESISTOR_0603_154K  [0603-RES]  81.26,151.12 180 bottom
R116  RESISTOR_0603_1K  [0603-RES]  23.9,154.98 90 top
R117  RESISTOR_0603_1K  [0603-RES]  28.64,154.97 90 top
R118  RESISTOR_0603_1K  [0603-RES]  26.27,154.97 90 top
R119  RESISTOR_0603_1K  [0603-RES]  33.59,154.99 270 top
R120  RESISTOR_0603_1K  [0603-RES]  21.66,154.84 90 top
R121  RESISTOR_0603_1K  [0603-RES]  112.77,209.44 180 top
R122  RESISTOR_0603_360K  [0603-RES]  101.14,193.27 90 top
R123  RESISTOR_0603_510K  [0603-RES]  101.14,190.22 90 top
R124  RESISTOR_0603_33K  [0603-RES]  98.48,187.94 0 top
R125  RESISTOR_0603_33K  [0603-RES]  98.48,186.28 0 top
R126  RESISTOR_0603_33K  [0603-RES]  88.44,186.41 180 top
R127  RESISTOR_0603_33K  [0603-RES]  88.44,188.06 180 top
R128  RESISTOR_0603_360K  [0603-RES]  87.55,193.91 90 top
R129  RESISTOR_0603_510K  [0603-RES]  87.55,190.6 90 top
R130  RESISTOR_B20_10K  [B20]  46.28,209.15 0 top
R131  RESISTOR_B20_10K  [B20]  153.09,208.51 0 top
R132  RESISTOR_B20_10K  [B20]  153.09,193.27 0 top
R133  RESISTOR_B20_750  [B20]  46.41,195.81 180 top
R134  RESISTOR_0603_22  [0603-RES]  181.03,341.48 270 top
R135  RESISTOR_0603_1K  [0603-RES]  181.03,311.58 270 top
R136  RESISTOR_0603_10K  [0603-RES]  179.27,315.04 270 top
R137  RESISTOR_0603_10K  [0603-RES]  179.12,327.51 270 top
R138  RESISTOR_0603_10K  [0603-RES]  179.12,341.48 270 top
R139  RESISTOR_0603_60.4  [0603-RES]  143.46,308.54 90 top
R140  RESISTOR_0603_60.4  [0603-RES]  142.82,311.08 0 top
R141  RESISTOR_0603_22  [0603-RES]  181.03,327.51 270 top
R142  RESISTOR_0603_22  [0603-RES]  181.03,315.01 270 top
R143  RESISTOR_0603_1K  [0603-RES]  173.02,316.33 0 top
R144  RESISTOR_0603_1K  [0603-RES]  195.63,353.93 180 top
R145  RESISTOR_0603_1K  [0603-RES]  191.57,353.93 180 top
R146  RESISTOR_0603_1K  [0603-RES]  186.74,353.93 180 top
R147  RESISTOR_0603_1K  [0603-RES]  182.17,353.93 180 top
R148  RESISTOR_0603_33K  [0603-RES]  171.63,350.12 180 top
R149  RESISTOR_0603_12K  [0603-RES]  171.63,352.02 0 top
R150  RESISTOR_0603_33K  [0603-RES]  168.45,350.12 180 top
R151  RESISTOR_0603_12K  [0603-RES]  168.45,352.02 0 top
R152  RESISTOR_0603_33K  [0603-RES]  165.28,350.12 180 top
R153  RESISTOR_0603_12K  [0603-RES]  165.28,352.02 0 top
R154  RESISTOR_0603_33K  [0603-RES]  162.1,350.12 180 top
R155  RESISTOR_0603_12K  [0603-RES]  162.1,352.02 0 top
R156  RESISTOR_0603_33K  [0603-RES]  152.58,350.12 180 top
R157  RESISTOR_0603_12K  [0603-RES]  152.58,352.02 0 top
R158  RESISTOR_0603_1K  [0603-RES]  209.75,348.31 180 top
R159  RESISTOR_0603_1K  [0603-RES]  204.04,348.31 180 top
R160  RESISTOR_0603_1K  [0603-RES]  213.89,348.31 180 top
R161  RESISTOR_0603_1K  [0603-RES]  144.7,335 270 top
R162  RESISTOR_0603_33K  [0603-RES]  158.93,350.12 180 top
R163  RESISTOR_0603_12K  [0603-RES]  158.93,352.02 0 top
R164  RESISTOR_0603_1K  [0603-RES]  148.39,332.87 180 top
R165  RESISTOR_0603_10K  [0603-RES]  151.94,336.14 270 top
R166  RESISTOR_0603_10K  [0603-RES]  164.64,335.64 270 top
R167  RESISTOR_0603_100K  [0603-RES]  153.7,336.17 90 top
R168  RESISTOR_0603_1K  [0603-RES]  176,354.69 180 top
R169  RESISTOR_0603_10K  [0603-RES]  152.02,332.94 90 top
R170  RESISTOR_0603_240  [0603-RES]  153.64,332.94 90 top
R171  RESISTOR_0603_33K  [0603-RES]  155.75,350.12 180 top
R172  RESISTOR_0603_12K  [0603-RES]  155.75,352.02 0 top
R173  RESISTOR_0603_1K  [0603-RES]  199.44,348.31 180 top
R174  RESISTOR_0603_240  [0603-RES]  181.23,302.69 90 bottom
R175  RESISTOR_0805_56  [0805-RES]  31.17,332.97 270 top
R176  RESISTOR_0805_56  [0805-RES]  36.25,332.97 270 top
R177  RESISTOR_0603_5.1  [0603-RES]  36.25,338.05 270 bottom
R178  RESISTOR_0805_56  [0805-RES]  81.97,332.97 270 bottom
R179  RESISTOR_0805_56  [0805-RES]  76.89,332.97 270 bottom
R180  RESISTOR_0603_5.1  [0603-RES]  76.89,338.05 270 top
SHDN_B  LED_0603_ORANGE  [0603-LED]  182.25,352.15 180 top
SHDN_BTN  CONNECTOR-2_μF_T_V_  [MOLEX_MICROFIT_PTH_VERTICAL_02_DUAL]  204.9,299.44 180 top
SHDN_C  LED_0603_ORANGE  [0603-LED]  186.61,352.15 180 top
SHDN_D  LED_0603_ORANGE  [0603-LED]  191.44,352.15 180 top
SHDN_E  LED_0603_ORANGE  [0603-LED]  195.76,352.15 180 top
SHDN_F  LED_0603_ORANGE  [0603-LED]  199.49,346.61 180 top
STATUS_4.0  LED_0603_RED  [0603-LED]  147.62,336.27 0 top
STATUS_4.1  LED_0603_RED  [0603-LED]  176.02,356.34 180 top
T1  TRANSFORMER_HM2112ZNLT_AIRGAP  [HM2112ZNLT_AIRGAP]  88.92,117.49 180 top
TP1  TEST_POINT  [MICRO_MINIATURE]  14.4,158.85 0 top
TP2  TEST_POINT  [MICRO_MINIATURE]  19.23,158.85 0 top
TP3  TEST_POINT  [MICRO_MINIATURE]  11.74,154.66 0 top
TP4  TEST_POINT  [MICRO_MINIATURE]  9.58,158.85 0 top
TP5  TEST_POINT  [MICRO_MINIATURE]  38.53,162.66 0 top
TP6  TEST_POINT  [MICRO_MINIATURE]  105.06,133.42 0 top
TP7  TEST_POINT  [MICRO_MINIATURE]  94.57,133.44 0 top
TP8  TEST_POINT  [MICRO_MINIATURE]  33.83,162.66 0 top
TP9  TEST_POINT  [MICRO_MINIATURE]  28.88,162.54 0 top
TP10  TEST_POINT  [MICRO_MINIATURE]  24.05,162.41 0 top
TP11  TEST_POINT  [MICRO_MINIATURE]  101.14,276.38 0 top
TP12  TEST_POINT  [MICRO_MINIATURE]  101.14,272.57 0 top
TP13  TEST_POINT  [MICRO_MINIATURE]  16.43,154.79 0 top
TP14  TEST_POINT  [MICRO_MINIATURE]  114.54,249.12 0 top
TP15  TEST_POINT  [MICRO_MINIATURE]  114.54,243.13 0 top
TP16  TEST_POINT  [MICRO_MINIATURE]  123.43,245.48 0 top
TP17  TEST_POINT  [MICRO_MINIATURE]  132.26,245.58 0 top
TP18  TEST_POINT  [MICRO_MINIATURE]  132.32,249.17 0 top
TP19  TEST_POINT  [MICRO_MINIATURE]  123.43,249.14 0 top
TP20  TEST_POINT  [MICRO_MINIATURE]  106.6,249.32 0 top
TP21  TEST_POINT  [MICRO_MINIATURE]  106.86,245.72 0 top
TP22  TEST_POINT  [5015]  191.19,356.47 0 top
TP23  TEST_POINT  [5015]  195.63,356.47 0 top
TP24  TEST_POINT  [5015]  213.92,350.37 0 top
TP25  TEST_POINT  [5015]  209.83,350.34 0 top
TP26  TEST_POINT  [5015]  204.01,350.37 0 top
TP27  TEST_POINT  [5015]  148.89,319.13 180 top
TP28  TEST_POINT  [5015]  149.15,324.84 0 top
TP29  TEST_POINT  [5015]  148.89,315.44 0 top
TP30  TEST_POINT  [5015]  176.58,352.02 180 top
TP31  TEST_POINT  [5015]  182.3,356.47 0 top
TP32  TEST_POINT  [5015]  186.74,356.47 180 top
TP33  TEST_POINT  [5015]  135.31,343.51 90 top
TP34  TEST_POINT  [5015]  199.57,350.37 0 top
TP_3.3V  TEST_POINT  [MICRO_MINIATURE]  103.14,74.62 0 top
TP_5V  TEST_POINT  [MICRO_MINIATURE]  103.08,78.32 0 top
TP_12V  TEST_POINT  [MICRO_MINIATURE]  103.12,81.93 0 top
TP_AMS_OK  TEST_POINT  [MICRO_MINIATURE]  103.25,87 0 top
TP_GND  TEST_POINT  [MICRO_MINIATURE]  103.32,71 0 top
TP_IMD_OK  TEST_POINT  [MICRO_MINIATURE]  103.12,90.96 0 top
TP_TSAL_GREEN  TEST_POINT  [MICRO_MINIATURE]  32.69,26.14 0 top
TP_TSAL_RED  TEST_POINT  [MICRO_MINIATURE]  45.39,15.72 0 top
TS+_OUT_TEST  TEST_POINT  [MICRO_MINIATURE]  85.63,29.85 180 top
U1  RELAY_SOLIDSTATE_NO  [DIP-4]  120.11,81.98 90 top
U2  ADG1423  [MSOP-10]  30.98,27.29 90 bottom
U3  LM555  [SOIC-08(NARROW,0.15")]  29.71,20.94 270 bottom
U4  OPAMP_1_CHANNEL_OPA991  [SC-70-5]  71.84,34.1 0 top
U5  LTC6820  [MSOP-16]  162.64,59.71 90 top
U6  ADM8316WBX30  [SOT-23-5]  186.52,61.43 180 top
U7  OPAMP_1_CHANNEL_OPA991  [SC-70-5]  40.62,31.26 90 top
U8  LOGICGATE_AND_DCK3  [SC-70-5]  55.07,37.2 0 top
U9  OPAMP_1_CHANNEL_OPA991  [SC-70-5]  52.3,32.48 0 top
U10  OPAMP_1_CHANNEL_OPA991  [SC-70-5]  77.73,34.13 0 top
U11  LOGICGATE_AND_DCK3  [SC-70-5]  69.02,40.63 0 top
U12  OPAMP_1_CHANNEL_OPA991  [SC-70-5]  58.81,32.68 0 top
U13  OPAMP_1_CHANNEL_OPA991  [SC-70-5]  50.68,27.07 0 top
U14  OPAMP_1_CHANNEL_OPA991  [SC-70-5]  75.19,26.79 0 top
U15  LOGICGATE_AND_DCK3  [SC-70-5]  74.91,38.96 0 top
U16  RELAY_SOLIDSTATE_NO  [DIP-4]  120.14,92.64 90 top
U17  VOLTAGE_REGULATOR_SOT223_3.3V  [SOT223]  146.13,22.96 0 top
U18  OPAMP_1_CHANNEL_OPA991  [SC-70-5]  26.03,23.35 180 top
U19  MAX7404  [SOIC-08(NARROW,0.15")]  98.25,23.95 270 top
U20  OPAMP_1_CHANNEL_OPA991  [SC-70-5]  91.64,25.35 270 top
U21  LOGICGATE_BUFFER  [SC-70-5]  174.17,63.73 90 top
U22  OPAMP_1_CHANNEL_OPA991  [SC-70-5]  140.84,45.32 270 top
U23  DCM4623TD2J13D0T70  [DCM4623]  76.45,250.36 90 bottom
U24  RELAY_SOLIDSTATE_NC_AG  [DIP-4_AIRGAP]  84.38,164.01 0 bottom
U25  TCAN1051HQV-Q1  [SOIC-08(NARROW,0.15")]  159.3,18.17 90 top
U26  MAX7404  [SOIC-08(NARROW,0.15")]  147.44,44.82 270 top
U27  OPAMP_1_CHANNEL_OPA991  [SC-70-5]  140.84,54.47 270 top
U28  MAX7404  [SOIC-08(NARROW,0.15")]  147.44,53.96 270 top
U29  OPAMP_1_CHANNEL_OPA991  [SC-70-5]  91.08,34.52 270 top
U30  MAX7404  [SOIC-08(NARROW,0.15")]  97.94,34.14 270 top
U31  LOGICGATE_INVERTER_DCKR  [SC-70-5]  60,158.22 180 top
U32  LTC3639  [MSE16(12)]  102.92,210.54 270 top
U33  VOLTAGE_REGULATOR_ADJ_LR8_DPAK  [DPAK(2-7K1S)]  106.86,238.23 0 bottom
U34  ISO224B_AIRGAP  [SOIC-08(WIDE,0.295")-AIRGAP]  98.09,165.08 180 top
U35  ISO224B_AIRGAP  [SOIC-08(WIDE,0.295")-AIRGAP]  90.98,165.08 180 top
U36  VOLTAGE_REGULATOR_SOT223_5V  [SOT223]  68.38,155.55 180 top
U37  LTC6994_1  [SOT-23-6]  77.4,156.83 270 bottom
U38  VOLTAGE_REGULATOR_SOT-223_5V  [SOT-223]  142.42,323.95 0 top
U39  ADM8316WBX30  [SOT-23-5]  159.44,335.89 0 top
U40  RELAY_SOLIDSTATE_NO  [DIP-4]  57.72,44.8 270 top
U41  LOGICGATE_BUFFER  [SC-70-5]  155.88,335.89 180 top
U100  MCP2562FD  [SOIC-08(NARROW,0.15")]  149.78,348.46 270 bottom
U101  MCP2562FD  [SOIC-08(NARROW,0.15")]  149.78,368.66 270 bottom
U$1  [GLV]  117.53,110.72 0 top
U$2  RELAY_SOLIDSTATE_NO  [DIP-4]  192.2,159.36 0 top
U$3  [TS]  106.81,127.74 90 top
U$4  [HV_0.50"]  103,120.73 0 top
U$5  [GLV]  74.35,128.5 90 top
U$6  [MOUNTING_M3']  101.96,4.5 0 top
U$7  [MOUNTING_M3']  22.97,4.5 0 top
U$8  [MOUNTING_M3']  200.63,16.41 0 top
U$9  [TS]  79.43,129.77 90 top
U$10  [TS]  116.26,117.07 180 top
U$11  [MOUNTING_M3']  192.64,17.89 0 top
U$12  [MOUNTING_M3']  135.89,17.89 0 top
U$13  [MOUNTING_M3']  62.64,17.89 0 top
U$14  [MOUNTING_M3']  200.63,69.39 0 top
U$15  [LOGO_HYTECH_EXTRA_LARGE]  55.2,48.54 0 top
U$16  [LOGO_GT_0.50"]  115.24,13.95 0 top
U$17  [MOUNTING_M3']  192.64,67.89 0 top
U$18  [MOUNTING_M3']  135.89,67.89 0 top
U$19  [MOUNTING_M3']  62.64,67.89 0 top
U$20  [MOUNTING_M3']  22.96,69.39 0 top
U$21  [MOUNTING_M3']  69.47,131.24 0 top
U$22  [MOUNTING_M3']  115.97,131.24 0 top
U$23  [MOUNTING_M3]  14.94,149.85 0 top
U$24  [MOUNTING_M3]  14.95,223.76 0 top
U$25  [MOUNTING_M3]  76.44,149.86 0 top
U$26  [MOUNTING_M3]  199.12,153.84 0 top
U$27  [MOUNTING_M3]  199.13,219.73 0 top
U$28  [MOUNTING_M3]  45.44,281.59 0 top
U$29  [MOUNTING_M3]  138.11,281.59 0 top
U$30  [MOUNTING_M3]  59.36,266.35 0 top
U$31  [MOUNTING_M3]  93.37,266.35 0 top
U$32  [MOUNTING_M3]  59.36,234.39 0 top
U$33  [MOUNTING_M3]  93.37,234.39 0 top
U$34  [MOUNTING_M3]  184.12,166.27 0 top
U$35  [MOUNTING_M3]  6.46,154.36 0 top
U$36  [MOUNTING_M3]  85.45,154.36 0 top
U$37  [MOUNTING_M3]  6.45,219.25 0 top
U$38  [MOUNTING_M3]  184.12,219.25 0 top
U$39  [MOUNTING_M3]  99.46,281.1 0 top
U$40  [MOUNTING_M3']  213.59,375.69 0 top
U$41  [MOUNTING_M3]  52.96,281.1 0 top
U$42  [MOUNTING_M3']  133.23,297.87 0 top
U$43  [LOGO_HYTECH_MEDIUM]  102.29,256.77 0 top
U$44  [HV_0.50"]  193.98,194.54 0 top
U$45  [HV_0.50"]  191.82,180.06 0 top
U$46  [HV_LARGE]  48.95,223.75 0 top
U$47  [HV_LARGE]  108.64,193.91 0 top
U$48  [HV_1.00"]  94.03,193.91 0 top
U$49  [MOUNTING_M3']  213.59,297.87 0 top
U$50  [MOUNTING_M3']  133.23,375.69 0 top
U$51  [LOGO_HYTECH_MEDIUM]  138.35,315.14 90 top
U$52  [HV_1.00"]  148.77,223.5 0 top
U$53  [TS]  54.03,275.82 0 top
U$54  [LOGO_GT_0.50"]  135.31,260.45 0 top
U$55  [LOGO_HYTECH_SQUARE_0.28"]  121.46,154.15 0 top
U$56  [GLV]  109.65,156.19 0 top
U$57  [GLV]  124.13,160 0 top
U$58  [GLV]  157.66,160.89 0 top
U$59  [GLV]  178.61,154.15 0 top
U$60  [GLV]  60.3,162.76 0 top
U$61  [GLV]  24.38,160 0 top
U$62  [GLV]  4.37,158.47 0 top
U$63  [TS]  4.24,161.77 0 top
U$64  [TS]  17.25,162.66 0 top
U$65  [TS]  67.06,163.09 0 top
U$66  [TS]  109.53,159.87 0 top
U$67  [TS]  73.71,162.66 0 top
U$68  [TS]  117.4,161.14 0 top
U$69  [TS]  166.04,161.01 0 top
U$70  [TS]  99.75,266.93 0 top
U$71  [TS]  119.3,282.93 0 top
U$72  [GLV]  59.61,275.95 0 top
U$73  [GLV]  93.65,272.98 0 top
U$74  [GLV]  113.84,283.06 0 top
U$75  [TS]  178.36,157.96 0 top
U$76  [LOGO_GT_LARGE]  142.29,183.11 0 bottom
U$77  [LOGO_HYTECH_EXTRA_LARGE]  83.24,172.95 0 bottom
U$78  RELAY_SOLIDSTATE_NO  [DIP-4]  166.12,329.01 270 top
U$79  [LOGO_HYTECH_LARGE]  181.66,324.72 0 bottom
U$80  [LOGO_GT_LARGE]  200,351.23 0 bottom
U$81  [LOGO_HYTECH_MEDIUM]  13.39,335.51 0 top
U$82  [LOGO_HYTECH_MEDIUM]  99.75,335.51 0 bottom
U$100  RELAY_SOLIDSTATE_NO  [DIP-4]  172.54,312.35 0 bottom
WATCHDOG_OK  TEST_POINT  [MICRO_MINIATURE]  191.8,51.51 0 top
XB1  BATTERY_HOLDER_KEYSTONE_498  [498]  207.44,362.43 270 top
XF1  FUSE_HOLDER_MINIBLADEPTH  [3568]  131.5,30.71 90 top
XF2  FUSE_HOLDER_MINIBLADEPTH  [3568]  87.05,285.98 270 top
XF3  FUSE_HOLDER_MINIBLADEPTH  [3568]  156.64,315.7 90 top
XF4  FUSE_HOLDER_MINIBLADEPTH  [3568]  165.53,315.7 90 top